# Altium PCB science_board_pcb.PcbDoc
Units mm, origin at the board's own origin, x right, y up, seen from the top; angles counter-clockwise.
Board outline 99.7 x 80 mm, 2 copper layers (Top Layer, GND); 126 components, 64 nets, 371 pads, 90 vias.
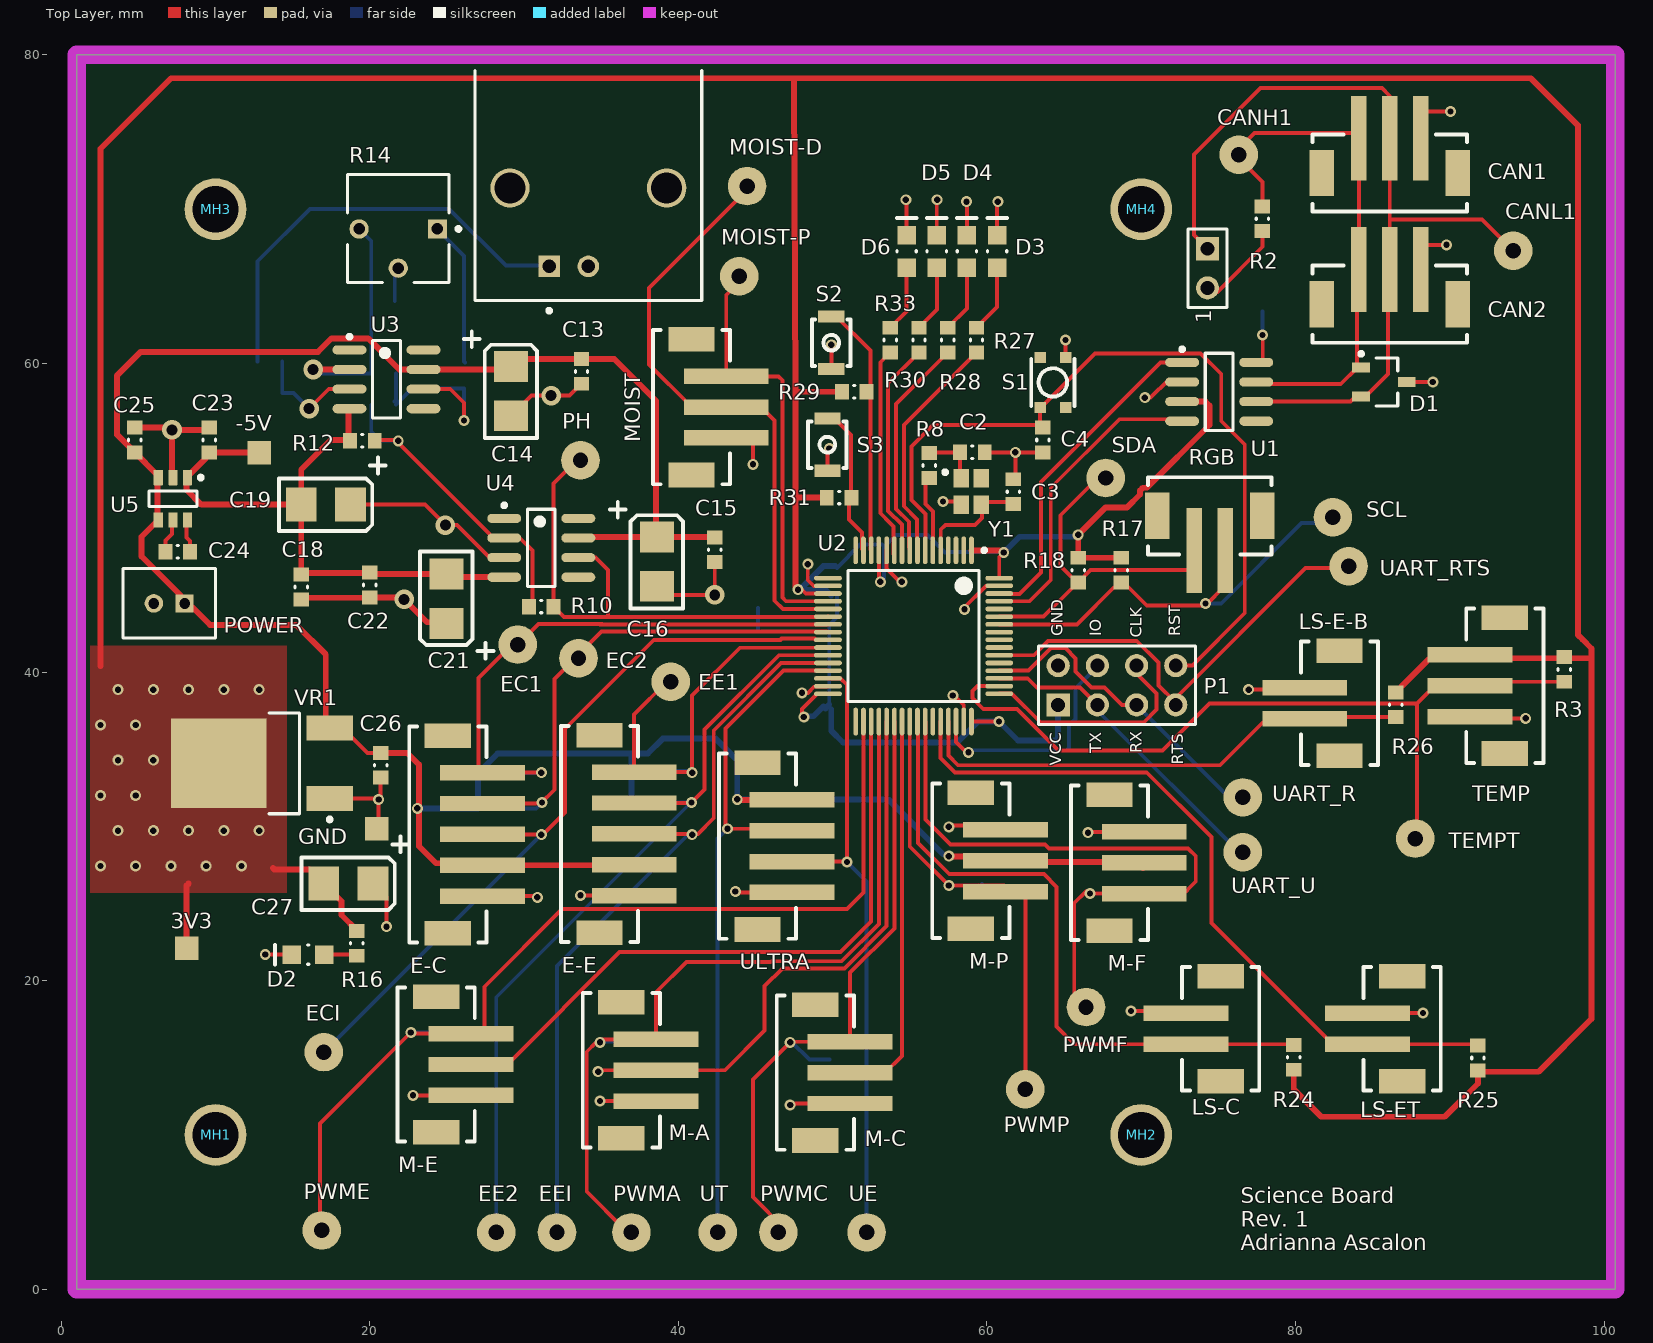
[diagram p0: Top Layer view]
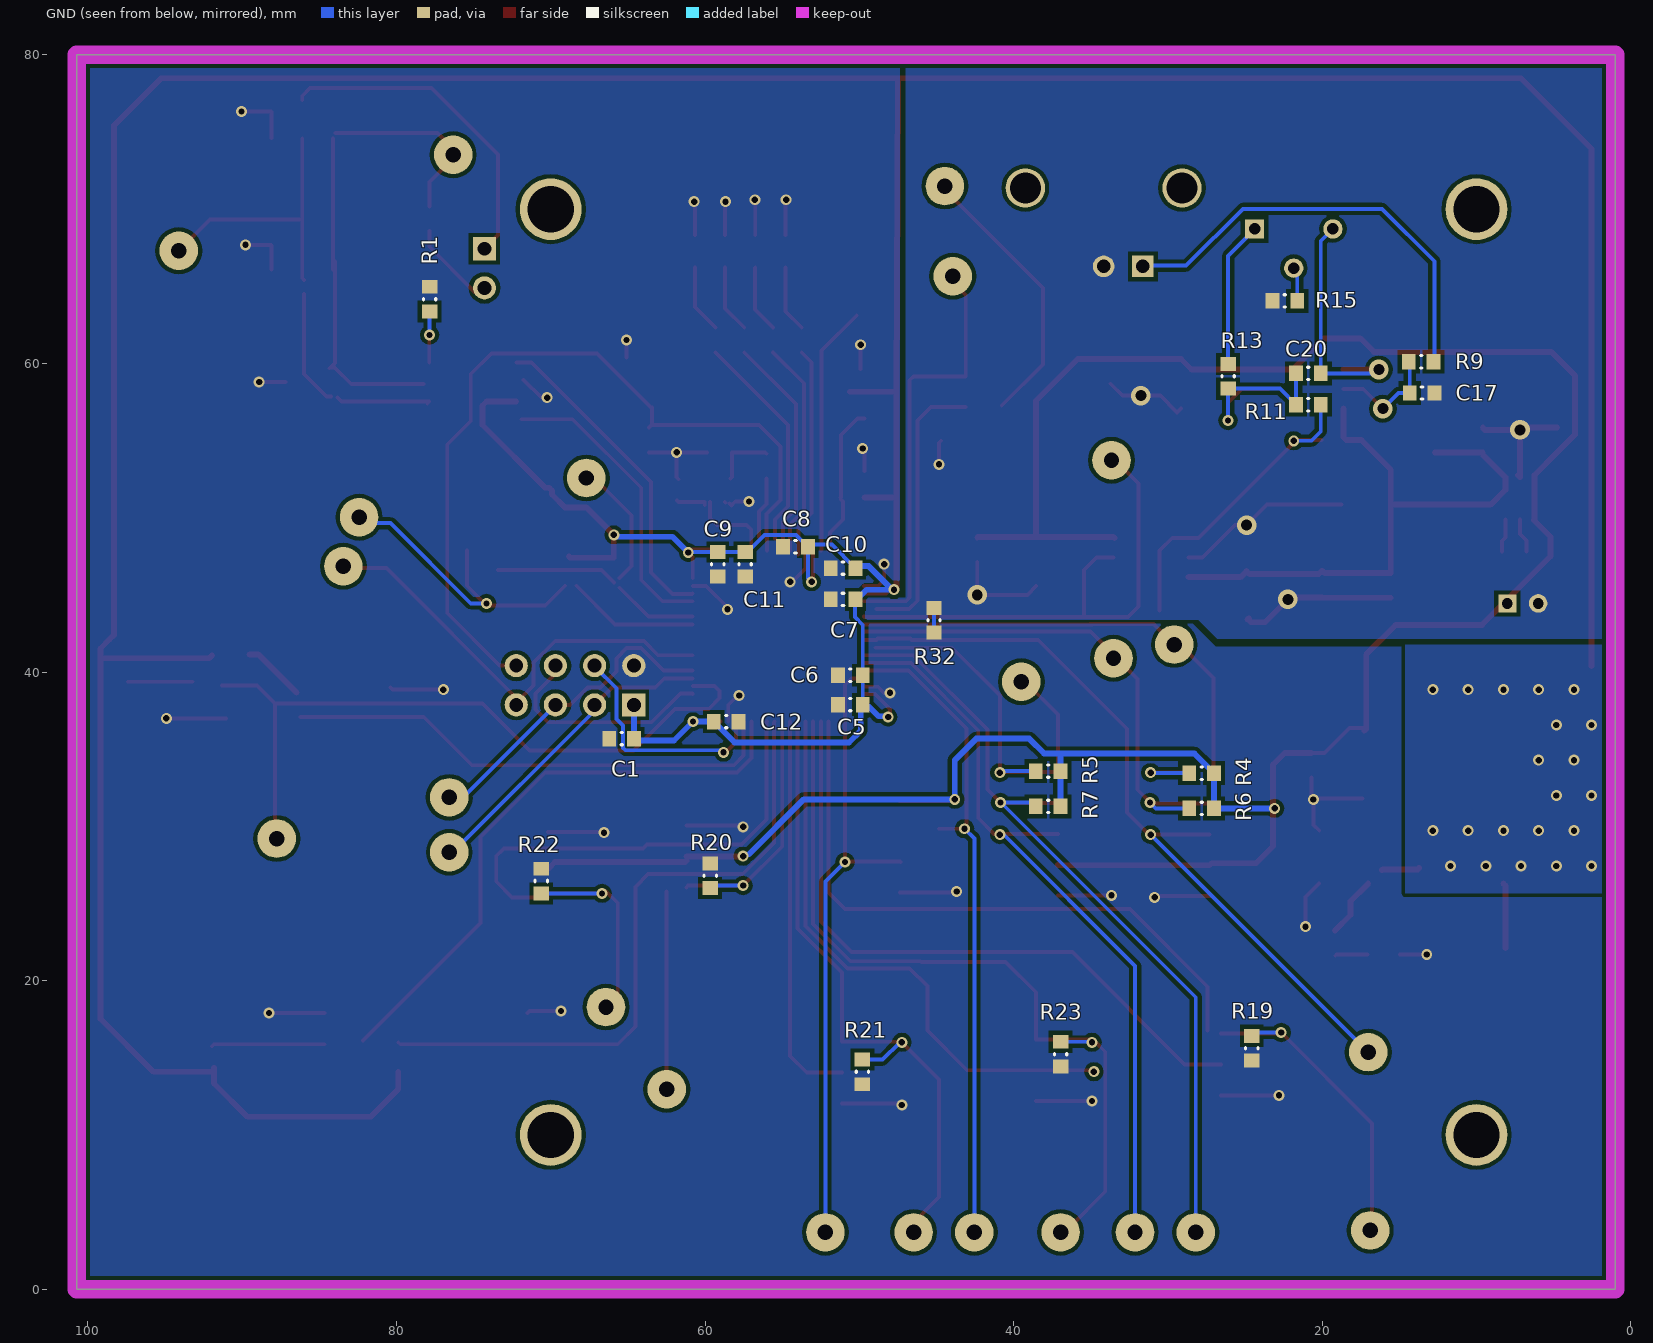
[diagram p1: GND view, seen from below]

## Layer stack, top to bottom
Top Solder: solder mask 0.0102, Solder Resist, Dk 3.5
Top Layer: signal copper 0.0356
Dielectric 1: dielectric 0.32, FR-4, Dk 4.8
GND: signal copper 0.0356
Bottom Solder: solder mask 0.0102, Solder Resist, Dk 3.5

## Board outline
1.016,0 100.711,0 100.711,80 1.016,80

## Design rules (kind name [scope] priority, off if disabled: settings)
BoardOutlineClearance [All] p1: gap=0.254 ignorepadtopadclearanceinfootprint=FALSE except(0: Arc-SplitContinuation Track-SplitContinuation SMDPad-SplitContinuation THPad-SplitContinuation Via-SplitContinuation Fill-SplitContinuation Poly-SplitContinuation Region-SplitContinuation Text-SplitContinuation)
Clearance [All] p1: gap=0.254 ignorepadtopadclearanceinfootprint=TRUE except(0: Arc-Hole Track-Hole SMDPad-Hole THPad-Hole Via-Hole Fill-Hole Poly-Hole Region-Hole Text-Hole; 0.127: Arc-SMDPad Track-SMDPad SMDPad-SMDPad; 0.203: Arc-Arc Arc-Track Track-Track)
HoleSize [All] p1: absolutevalues=TRUE maxlimit=3.81 minlimit=0.025 maxpercent=80.000 minpercent=20.000
PolygonConnect [All] p1: connectstyle=Direct reliefconductorwidth=0.254 reliefentries=4 polygonreliefangle="90 Angle" airgapwidth=0.254
RoutingVias [All] p1: holewidth=0.406 width=0.711 viastyle="Through Hole" minholewidth=0.406 minwidth=0.711 maxholewidth=0.711 maxwidth=1.27
SolderMaskExpansion [All] p1: expansion=0.102
Width thicc [(InNet('-5V') OR InNet('+3V3') OR InNet('+5V'))] p1: maxlimit=0.508 minlimit=0.254 preferedwidth=0.381 minimp=50.000000 maximp=50.000000 favimp=50.000000
Width [All] p2: maxlimit=0.508 minlimit=0.203 preferedwidth=0.254 bottomlayer_minwidth=0.254 bottomlayer_maxwidth=0.254 minimp=50.000000 maximp=50.000000 favimp=50.000000
29 further rules are at their usual default settings.

## Classes and differential pairs
component class support: -5V D3 D4 D5 D6 EC1 EC2 ECI EE1 EE2 EEI MH1 MH2 MH3 MH4 MOIST-D MOIST-P PH PWMA PWMC PWME PWMF PWMP R17 R18 R19 R20 R21 R22 R23 R24 R25 R26 R27 R28 R29 R30 R31 R32 R33 S2 S3 SCL SDA TEMPT UART_R UART_RTS UART_U UE UT
component class power: 3V3 C26 C27 D2 GND R16 VR1
component class ph: C13 C14 C15 C16 C17 C18 C19 C20 C21 C22 C23 C24 C25 R9 R10 R11 R12 R13 R14 R15 U3 U4 U5
component class mcu: C2 C3 C4 C5 C6 C7 C8 C9 C10 C11 C12 R8 S1 U2 Y1
component class connectors: CAN1 CAN2 E-C E-E LS-C LS-E-B LS-ET M-A M-C M-E M-F M-P MOIST P1 POWER R3 R4 R5 R6 R7 RGB TEMP ULTRA
component class can: 1 C1 CANH1 CANL1 D1 R1 R2 U1

## Components (designator, comment, footprint, x,y, rotation, side; value= is the part's Value field where it differs from the comment)
1 "Header 2" HDR1X2 74.295,67.437 r270 top
3V3 "TESTPOINT_SMD" TESTPOINT 8.128,22.098 r90 top
-5V "TESTPOINT_SMD" TESTPOINT 12.827,54.229 r90 top
C1 "CAP_0.1uF_16V_0603" CAPC0603(1608)55_N 65.405,35.687 r180 bottom value=0.1uF
C2 "CAP_15pF_0603" CAPC0603(1608)55_N 59.055,54.24 r180 top locked value=15pF
C3 "CAP_15pF_0603" CAPC0603(1608)55_N 61.715,51.699 r270 top locked value=15pF
C4 "CAP_0.1uF_16V_0603" CAPC0603(1608)55_N 63.627,55.04 r90 top locked value=0.1uF
C5 "CAP_0.1uF_16V_0603" CAPC0603(1608)55_N 50.579,37.895 r0 bottom value=0.1uF
C6 "CAP_0.1uF_16V_0603" CAPC0603(1608)55_N 50.579,39.8 r0 bottom value=0.1uF
C7 "CAP_0.1uF_16V_0603" CAPC0603(1608)55_N 51.054,44.708 r0 bottom value=0.1uF
C8 "CAP_4.7uF_0603" CAPC0603(1608)55_N 54.135,48.116 r180 bottom value=4.7uF
C9 "CAP_0.1uF_16V_0603" CAPC0603(1608)55_N 59.182,46.99 r270 bottom value=0.1uF
C10 "CAP_4.7uF_0603" CAPC0603(1608)55_N 51.054,46.74 r180 bottom value=4.7uF
C11 "CAP_10nF_0603" CAPC0603(1608)55_N 57.404,46.99 r90 bottom value=10nF
C12 "CAP_1uF_16V_0603" CAPC0603(1608)55_N 58.636,36.79 r0 bottom value=1uF
C13 "CAP_0.1uF_50V_0603" CAPC0603(1608)55_N 33.72,59.485 r90 top value=0.1uF
C14 "CAP_10uF_0603_POL" AVX-CAPC3528_V 29.148,58.215 r270 top value=10uF
C15 "CAP_0.1uF_50V_0603" CAPC0603(1608)55_N 42.356,47.928 r90 top value=0.1uF
C16 "CAP_10uF_0603_POL" AVX-CAPC3528_V 38.608,47.166 r270 top value=10uF
C17 "CAP_2.2nF_0603" CAPC0603(1608)55_N 13.527,58.088 r0 bottom value=2.2nF
C18 "CAP_0.1uF_50V_0603" CAPC0603(1608)55_N 15.559,45.515 r90 top value=0.1uF
C19 "CAP_10uF_0603_POL" AVX-CAPC3528_V 17.159,50.849 r180 top value=10uF
C20 "CAP_1uF_16V_0603" CAPC0603(1608)55_N 20.893,59.358 r0 bottom value=1uF
C21 "CAP_10uF_0603_POL" AVX-CAPC3528_V 24.957,44.753 r90 top value=10uF
C22 "CAP_0.1uF_50V_0603" CAPC0603(1608)55_N 20.004,45.642 r90 top value=0.1uF
C23 "CAP_1uF_16V_0603" CAPC0603(1608)55_N 9.59,55.04 r90 top value=1uF
C24 "CAP_1uF_16V_0603" CAPC0603(1608)55_N 7.558,47.801 r0 top value=1uF
C25 "CAP_1uF_16V_0603" CAPC0603(1608)55_N 4.764,55.04 r270 top value=1uF
C26 "CAP_0.33uF_16V_0603" CAPC0603(1608)55_N 20.701,33.958 r90 top value=0.33uF
C27 "10uF" AVX-CAPC3528_V 18.618,26.289 r180 top
CAN1 "PH TOP SMD" JST-B3B-SM4-TB 86.106,69.85 r0 top
CAN2 "PH TOP SMD" JST-B3B-SM4-TB 86.106,61.341 r0 top locked
CANH1 "TESTPOINT_LOOP" TESTPOINT_LOOP 76.327,73.533 r0 top
CANL1 "TESTPOINT_LOOP" TESTPOINT_LOOP 94.107,67.31 r90 top
D1 "TVS_DIODE_CAN" TVS_DIODE_CAN 85.725,58.801 r0 top
D2 "DIO_LED_R" LED_0805_LINE 16.002,21.688 r180 top
D3 "DIO_LED_Y" LED_0805_LINE 60.655,67.267 r90 top
D4 "DIO_LED_G" LED_0805_LINE 58.7,67.267 r90 top
D5 "DIO_LED_G" LED_0805_LINE 56.744,67.267 r90 top
D6 "DIO_LED_G" LED_0805_LINE 54.789,67.267 r90 top
E-C "PH TOP SMD" JST-B5B-SM4-TB 22.555,29.481 r270 top
E-E "PH TOP SMD" JST-B5B-SM4-TB 32.385,29.512 r270 top
EC1 "TESTPOINT_LOOP" TESTPOINT_LOOP 29.591,41.783 r0 top
EC2 "TESTPOINT_LOOP" TESTPOINT_LOOP 33.528,40.894 r0 top
ECI "TESTPOINT_LOOP" TESTPOINT_LOOP 17.018,15.367 r0 top
EE1 "TESTPOINT_LOOP" TESTPOINT_LOOP 39.497,39.37 r90 top
EE2 "TESTPOINT_LOOP" TESTPOINT_LOOP 28.194,3.683 r90 top
EEI "TESTPOINT_LOOP" TESTPOINT_LOOP 32.131,3.683 r90 top
GND "TESTPOINT_SMD" TESTPOINT 20.447,29.845 r90 top
LS-C "PH TOP SMD" JST-B2B-SM4-TB 77.648,16.875 r90 top locked
LS-E-B "PH TOP SMD" JST-B2B-SM4-TB 85.344,37.973 r90 top
LS-ET "PH TOP SMD" JST-B2B-SM4-TB 89.408,16.875 r90 top locked
M-A "PH TOP SMD" JST-B3B-SM4-TB 33.803,14.194 r270 top
M-C "PH TOP SMD" JST-B3B-SM4-TB 46.376,14.038 r270 top
M-E "PH TOP SMD" JST-B3B-SM4-TB 21.801,14.565 r270 top
M-F "PH TOP SMD" JST-B3B-SM4-TB 65.445,27.641 r270 top locked
M-P "PH TOP SMD" JST-B3B-SM4-TB 56.456,27.768 r270 top
MH1 "MOUNTING_HOLES" MOUNTING_HOLE#1 5.715,8 r0 top
MH2 "MOUNTING_HOLES" MOUNTING_HOLE#2 122,5 r0 top
MH3 "MOUNTING_HOLES" MOUNTING_HOLE#3 106,11 r0 top
MH4 "MOUNTING_HOLES" MOUNTING_HOLE#4 111.374,5.612 r0 top
MOIST "PH TOP SMD" JST-B3B-SM4-TB 38.354,57.176 r270 top
MOIST-D "TESTPOINT_LOOP" TESTPOINT_LOOP 44.45,71.501 r90 top
MOIST-P "TESTPOINT_LOOP" TESTPOINT_LOOP 43.942,65.659 r90 top
P1 "HEADER 4X2" HEADER_2X4 64.616,37.876 r0 top locked
PH "TESTPOINT_LOOP" TESTPOINT_LOOP 33.655,53.721 r90 top
POWER "PH TOP TH" JST-B2B-PHSK 7.001,44.45 r180 top
PWMA "TESTPOINT_LOOP" TESTPOINT_LOOP 36.957,3.683 r90 top
PWMC "TESTPOINT_LOOP" TESTPOINT_LOOP 46.482,3.683 r90 top
PWME "TESTPOINT_LOOP" TESTPOINT_LOOP 16.891,3.81 r90 top
PWMF "TESTPOINT_LOOP" TESTPOINT_LOOP 66.421,18.288 r90 top
PWMP "TESTPOINT_LOOP" TESTPOINT_LOOP 62.484,12.954 r90 top
R1 "RES_0R_0603" RESC0603(1608)_N 77.851,64.173 r90 bottom value=0R
R2 "RES_120R_0603" RESC0603(1608)_N 77.851,69.38 r270 top value=120R
R3 "RES_4K7_0603" RESC0603(1608)_N 97.409,40.17 r90 top value=4K7
R4 "RES_10K_0603" RESC0603(1608)_N 27.813,33.45 r180 bottom value=10K
R5 "RES_10K_0603" RESC0603(1608)_N 37.766,33.585 r180 bottom value=10K
R6 "RES_10K_0603" RESC0603(1608)_N 27.813,31.165 r180 bottom value=10K
R7 "RES_10K_0603" RESC0603(1608)_N 37.766,31.291 r180 bottom value=10K
R8 "RES_0R_0603" RESC0603(1608)_N 56.261,53.389 r90 top value=0R
R9 "RES_4M7_0603" RESC0603(1608)_N 13.589,60.12 r0 bottom value=4.7M
R10 "RES_30K_0603" RESC0603(1608)_N 31.115,44.245 r0 top value=30K
R11 "RES_30K_0603" RESC0603(1608)_N 20.893,57.326 r180 bottom value=30K
R12 "RES_75K_0603" RESC0603(1608)_N 19.52,54.991 r0 top value=75K
R13 "RES_2K2_0603" RESC0603(1608)_N 26.1,59.17 r270 bottom value=2K2
R14 "POT_5K" 3362P-1-502LF 21.844,68.756 r180 top value=5K
R15 "RES_1K_0603" RESC0603(1608)_N 22.417,64.057 r180 bottom value=1K
R16 "RES_100R_0603" RESC0603(1608)_N 19.153,22.413 r90 top value=100R
R17 "RES_4K7_0603" RESC0603(1608)_N 68.707,46.609 r90 top value=4K7
R18 "RES_4K7_0603" RESC0603(1608)_N 65.913,46.609 r90 top value=4K7
R19 "RES_10K_0603" RESC0603(1608)_N 24.56,15.621 r90 bottom value=10K
R20 "RES_10K_0603" RESC0603(1608)_N 59.67,26.797 r270 bottom value=10K
R21 "RES_10K_0603" RESC0603(1608)_N 49.797,14.088 r90 bottom value=10K
R22 "RES_10K_0603" RESC0603(1608)_N 70.612,26.454 r270 bottom value=10K
R23 "RES_10K_0603" RESC0603(1608)_N 36.957,15.24 r90 bottom value=10K
R24 "RES_10K_0603" RESC0603(1608)_N 79.883,15.024 r270 top value=10K
R25 "RES_10K_0603" RESC0603(1608)_N 91.821,14.986 r270 top value=10K
R26 "RES_10K_0603" RESC0603(1608)_N 86.487,37.884 r90 top value=10K
R27 "RES_100R_0603" RESC0603(1608)_N 59.321,61.52 r90 top value=100R
R28 "RES_100R_0603" RESC0603(1608)_N 57.458,61.52 r90 top value=100R
R29 "RES_10K_0603" RESC0603(1608)_N 51.397,58.166 r180 top value=10K
R30 "RES_100R_0603" RESC0603(1608)_N 55.596,61.52 r90 top value=100R
R31 "RES_10K_0603" RESC0603(1608)_N 50.419,51.308 r0 top value=10K
R32 "RES_0R_0603" RESC0603(1608)_N 45.162,43.356 r90 bottom value=0R
R33 "RES_100R_0603" RESC0603(1608)_N 53.733,61.52 r90 top value=100R
RGB "PH TOP SMD" JST-B2B-SM4-TB 74.438,52.629 r180 top
S1 "SW_PWR" PTS830GM140 64.271,58.77 r270 top
S2 "SW_TACTILE" B3U-1100P 49.911,61.341 r270 top
S3 "SW_TACTILE" B3U-1100P 49.657,54.737 r270 top
SCL "TESTPOINT_LOOP" TESTPOINT_LOOP 82.423,50.038 r0 top
SDA "TESTPOINT_LOOP" TESTPOINT_LOOP 67.691,52.578 r0 top
TEMP "PH TOP SMD" JST-B3B-SM4-TB 96.063,39.116 r90 top
TEMPT "TESTPOINT_LOOP" TESTPOINT_LOOP 87.757,29.21 r90 top
U1 "IC TXRX CAN" LT-S8_N 75.05,58.166 r0 top
U2 "STM32F091RC" STM_LQFP64_N 55.245,42.34 r270 top locked
U3 "CA3140AMZ" CA3140AMZ 21.082,58.977 r0 top
U4 "TL081BCDG4" TL081BCDG4 31.115,48.055 r0 top
U5 "LM2776" SOT23-6 7.239,51.23 r270 top
UART_R "TESTPOINT_LOOP" TESTPOINT_LOOP 76.581,31.877 r90 top
UART_RTS "TESTPOINT_LOOP" TESTPOINT_LOOP 83.439,46.863 r90 top
UART_U "TESTPOINT_LOOP" TESTPOINT_LOOP 76.581,28.321 r90 top
UE "TESTPOINT_LOOP" TESTPOINT_LOOP 52.197,3.683 r90 top
ULTRA "PH TOP SMD" JST-B4B-SM4-TB 42.621,28.718 r270 top locked
UT "TESTPOINT_LOOP" TESTPOINT_LOOP 42.545,3.683 r90 top
VR1 "5V0_3V3_LDO" VOLTAGE_REGULATOR 14.605,34.085 r90 top
Y1 "CRYSTAL_32MHZ" AVX-CX2520DB32000D0GEJZ1-4_V 58.992,51.699 r0 top locked

## Footprints (in the part's own frame and the unit in brackets; to place one, negate y for a bottom-side part, rotate by r counter-clockwise, add the part's x,y. Pads: shape width x height; smd on the part's side, far side on the other; paste and mask are expansions set on the pad)
3362P-1-502LF [mm]
  rect 1.25x1.25 hole 0.75: 1(-2.54,0.035)
  round 1.25 hole 0.75: 2(0,2.575) 3(2.54,0.035)
  silkscreen extent -4.03,-3.49 3.3,3.49, body extent -3.3,-3.49 3.3,3.49, height 4.95
AVX-CAPC3528_V [mm] "SMT Capacitor, 2 Leads, Body 3.5x2.8mm"
  rect 2x2.2 smd: 1(-1.6,0) 2(1.6,0)
  silkscreen extent -3.87,-3.05 3.05,1.7, body extent -1.79,-1.54 1.8,1.54, height 1.9
AVX-CX2520DB32000D0GEJZ1-4_V [mm] "Hand Drawn, 4-Leads,Body 2.5x2mm"
  rect 1x1.2 smd: 1(-0.65,0.85) 2(-0.65,-0.85) 3(0.65,-0.85) 4(0.65,0.85)
  silkscreen extent -1.82,1.13 -1.58,1.38, body extent -1,-1.25 1,1.25, height 0.55
B3U-1100P [mm] "TACTILE SWITCH GREY"
  rect 0.8x1.7 smd: 1(-1.7,0) 2(1.7,0)
  silkscreen extent -1.5,-1.25 1.5,1.25
CA3140AMZ [mm]
  oval 2.2x0.6 smd: 1(-2.4,1.905) 2(-2.4,0.635) 3(-2.4,-0.635) 4(-2.4,-1.905) 5(2.4,-1.905) 6(2.4,-0.635) 7(2.4,0.635) 8(2.4,1.905)
  silkscreen extent -2.52,-2.5 0.9,2.88, body extent -2,-2.5 2,2.5, height 1.75
CAPC0603(1608)55_N [mm] "Chip Capacitor, Body 1.6x0.8mm, Height 0.55mm, IPC Medium Density"
  rect 0.9x1 smd: 1(-0.8,0) 2(0.8,0)
  silkscreen extent -0.05,-0.4 0.05,0.4, body extent -0.87,-0.48 0.88,0.47, height 0.55
HDR1X2 [mm] "Connector; Header; 2 Position"
  rect 1.5x1.5 hole 0.9: 1(0,0)
  round 1.5 hole 0.9: 2(2.54,0)
  silkscreen extent -1.27,-1.27 3.81,1.27
HEADER_2X4 [mm]
  rect 1.5x1.5 hole 0.9: 1(0,0)
  round 1.5 hole 0.9: 2(2.54,0) 3(5.08,0) 4(7.62,0) 5(0,2.54) 6(2.54,2.54) 7(5.08,2.54) 8(7.62,2.54)
  silkscreen extent -1.27,-1.27 8.89,3.81
JST-B2B-PHSK [mm]
  rect 1.162x1.162 / inner rect 1.524x1.524 / far side rect 1.162x1.162 hole 0.7: 1(-1,0)
  round 1.2 / inner round 1.524 / far side round 1.2 hole 0.7: 2(1,0)
  silkscreen extent -3,-2.25 3,2.25
JST-B2B-SM4-TB [mm]
  rect 1x5.5 smd: 1(-1,4.75) 2(1,4.75)
  rect 1.6x3 smd: 3(-3.4,2.5) 4(3.4,2.5)
  silkscreen extent -4,0 4,5
JST-B3B-SM4-TB [mm]
  rect 1x5.5 smd: 1(-2,4.75) 2(0,4.75) 3(2,4.75)
  rect 1.6x3 smd: 4(-4.4,2.5) 5(4.4,2.5)
  silkscreen extent -5,0 5,5
JST-B4B-SM4-TB [mm]
  rect 1x5.5 smd: 1(-3,4.75) 2(-1,4.75) 3(1,4.75) 4(3,4.75)
  rect 1.6x3 smd: 5(-5.4,2.5) 6(5.4,2.5)
  silkscreen extent -6,0 6,5
JST-B5B-SM4-TB [mm]
  rect 1x5.5 smd: 1(-4,4.75) 2(-2,4.75) 3(0,4.75) 4(2,4.75) 5(4,4.75)
  rect 1.6x3 smd: 6(-6.4,2.5) 7(6.4,2.5)
  silkscreen extent -7,0 7,5
LED_0805_LINE [mm] "SMD, 2-Leads, Body 2x1.25mm"
  rect 1.2x1.2 smd: 1(-1.05,0) 2(1.05,0)
  silkscreen extent -0.05,-0.63 2.16,0.64, body extent -1,-0.63 1,0.63, height 0.8
LT-S8_N [mm] "SOP, 8-Leads, Body 4.9x3.9mm, Pitch 1.27mm, IPC Medium Density"
  oval 2.2x0.6 smd: 1(-2.4,1.905) 2(-2.4,0.635) 3(-2.4,-0.635) 4(-2.4,-1.905) 5(2.4,-1.905) 6(2.4,-0.635) 7(2.4,0.635) 8(2.4,1.905)
  silkscreen extent -2.52,-2.5 0.9,2.88, body extent -2,-2.5 2,2.5, height 1.76
MOUNTING_HOLE#1 [mm]
  round 4 hole 3 unplated: 0(4.285,2)
MOUNTING_HOLE#2 [mm]
  round 4 hole 3 unplated: 0(-52,5)
MOUNTING_HOLE#3 [mm]
  round 4 hole 3 unplated: 0(-96,59)
MOUNTING_HOLE#4 [mm]
  round 4 hole 3 unplated: 0(-41.374,64.388)
PTS830GM140 [mm] "PWR TACTILE SWITCH (RED)"
  rect 0.7x0.75 smd: 1(-1.625,0.825) 2(1.625,0.825) 3(-1.625,-0.825) 4(1.625,-0.825)
  silkscreen extent -1.53,-1.4 1.52,1.4
RESC0603(1608)_N [mm] "Chip Resistor, Body 1.6x0.8mm, IPC Medium Density"
  rect 0.9x1 smd: 1(-0.8,0) 2(0.8,0)
  silkscreen extent -0.05,-0.4 0.05,0.4, body extent -0.85,-0.47 0.85,0.47, height 0.6
SOT23-6 [mm] "SOT23, 6-Leads, Body 3.05x1.75mm, Pitch 0.95mm, IPC Medium Density"
  rrect17% 1x0.6 smd: 1(-1.375,0.95) 2(-1.375,0) 3(-1.375,-0.95) 4(1.375,-0.95) 5(1.375,0) 6(1.375,0.95)
  silkscreen extent -1.5,-1.55 0.5,1.93, body extent -1.43,-1.48 1.43,1.49, height 0.9
STM_LQFP64_N [mm] "Thin QFP, 64-Leads, Body 10x10mm, Pitch 0.5mm, IPC Medium Density"
  oval 1.8x0.3 smd mask+0.05: 1(-5.55,3.75) 2(-5.55,3.25) 3(-5.55,2.75) 4(-5.55,2.25) 5(-5.55,1.75) 6(-5.55,1.25) 7(-5.55,0.75) 8(-5.55,0.25) 9(-5.55,-0.25) 10(-5.55,-0.75) 11(-5.55,-1.25) 12(-5.55,-1.75) 13(-5.55,-2.25) 14(-5.55,-2.75) 15(-5.55,-3.25) 16(-5.55,-3.75) 33(5.55,-3.75) 34(5.55,-3.25) 35(5.55,-2.75) 36(5.55,-2.25) 37(5.55,-1.75) 38(5.55,-1.25) 39(5.55,-0.75) 40(5.55,-0.25) 41(5.55,0.25) 42(5.55,0.75) 43(5.55,1.25) 44(5.55,1.75) 45(5.55,2.25) 46(5.55,2.75) 47(5.55,3.25) 48(5.55,3.75)
  oval 0.3x1.8 smd mask+0.05: 17(-3.75,-5.55) 18(-3.25,-5.55) 19(-2.75,-5.55) 20(-2.25,-5.55) 21(-1.75,-5.55) 22(-1.25,-5.55) 23(-0.75,-5.55) 24(-0.25,-5.55) 25(0.25,-5.55) 26(0.75,-5.55) 27(1.25,-5.55) 28(1.75,-5.55) 29(2.25,-5.55) 30(2.75,-5.55) 31(3.25,-5.55) 32(3.75,-5.55) 49(3.75,5.55) 50(3.25,5.55) 51(2.75,5.55) 52(2.25,5.55) 53(1.75,5.55) 54(1.25,5.55) 55(0.75,5.55) 56(0.25,5.55) 57(-0.25,5.55) 58(-0.75,5.55) 59(-1.25,5.55) 60(-1.75,5.55) 61(-2.25,5.55) 62(-2.75,5.55) 63(-3.25,5.55) 64(-3.75,5.55)
  silkscreen extent -5.67,-4.25 4.25,4.7, body extent -5,-5 5,5, height 1.6
TESTPOINT [mil]
  rect 60x60 smd: 1(0,0)
TESTPOINT_LOOP [mm]
  round 2.5 hole 1: 1(0,0)
TL081BCDG4 [mm]
  oval 2.2x0.6 smd: 1(-2.4,1.905) 2(-2.4,0.635) 3(-2.4,-0.635) 4(-2.4,-1.905) 5(2.4,-1.905) 6(2.4,-0.635) 7(2.4,0.635) 8(2.4,1.905)
  silkscreen extent -2.52,-2.5 0.9,2.88, body extent -2,-2.5 2,2.5, height 1.75
TVS_DIODE_CAN [mm] "SOT23, 3-Leads, Body 2.95x2.80mm, Pitch 0.95mm, IPC Low Density"
  rect 1.15x0.65 smd: 1(-1.475,0.95) 2(-1.475,-0.95) 3(1.475,0)
  silkscreen extent -1.6,-1.55 0.9,1.95, body extent -1.5,-1.55 1.5,1.55, height 1.25
VOLTAGE_REGULATOR [mm] "DPAK, 3-Leads, Body 6.095x6.54mm, Pitch 4.57mm"
  rect 1.6x3 smd: 1(-2.285,-2.79) 3(2.285,-2.79)
  rect 5.8x6.2 smd: 2(0,4.39)
  silkscreen extent -3.76,-2.92 3.27,1.14, body extent -3.27,-0.84 3.27,5.25, height 2.38

## Part data
1: "Header, 2-Pin", LatestRevisionDate=17-Jul-2002, LatestRevisionNote="Re-released for DXP Platform.", Publisher="Altium Limited"
C1 C4 C5 C6 C7 C9: "CAP CER 0.1UF 16V X7R 0603", Digikey Part Number=311-1088-1-ND, Manufacturer=Yageo, MPN=CC0603KRX7R7BB104, Package="0603 (1608 Metric)", Temperature Coefficient=X7R, Voltage Rating=16V, Dimensions="0.063\" L x 0.031\" W (1.60mm x 0.80mm)"
C2 C3: "CAP CER 15PF 250V NPO 0603", Digikey Part Number=311-3282-1-ND, Manufacturer=Yageo, MPN=AC0603JRNPOYBN150, Package="0603 (1608 Metric)", Temperature Coefficient=NP0, Voltage Rating=250v, Dimensions="0.063\" L x 0.031\" W (1.60mm x 0.80mm)"
C8 C10: "CAP CER 4.7UF 6.3V X5R 0603", Digikey Part Number=311-1521-1-ND, Manufacturer=Yageo, MPN=CC0603KRX5R5BB475, Package="0603 (1608 Metric)", Temperature Coefficient=X5R, Voltage Rating=6.3V, Dimensions="0.063\" L x 0.031\" W (1.60mm x 0.80mm)"
C11: "CAP CER 10000PF 16V X7R 0603", Digikey Part Number=311-3369-1-ND, Manufacturer=Yageo, MPN=CC0603KRX7R7BB103, Package="0603 (1608 Metric)", Temperature Coefficient=X7R, Voltage Rating=16V, Dimensions="0.063\" L x 0.031\" W (1.60mm x 0.80mm)"
C12 C20 C23 C24 C25: "CAP CER 1UF 16V Y5V 0603", Digikey Part Number=311-1372-1-ND, Manufacturer=Yageo, MPN=CC0603ZRY5V7BB105, Package="0603 (1608 Metric)", Temperature Coefficient=Y5V, Voltage Rating=16V, Dimensions="0.063\" L x 0.031\" W (1.60mm x 0.80mm)"
C13 C15 C18 C22: "CAP CER 0.1UF 50V X7R 0603", Digikey Part Number=311-1344-1-ND, Manufacturer=Yageo, MPN=CC0603KRX7R9BB104, Package="0603 (1608 Metric)", Temperature Coefficient=X7R, Voltage Rating=50V, Dimensions="0.063\" L x 0.031\" W (1.60mm x 0.80mm)"
C14 C16 C19 C21: "Capacitor, Tantalum, 10uF 10% 20V MCCT-B (3528)", Manufacturer=Yageo, Package="0603 (1608 Metric)", Part Number=CC0603MRX5R6BB106, Temperature Coefficient=X5R, Voltage Rating=10V, Dimensions="0.063\" L x 0.031\" W (1.60mm x 0.80mm)"
C17: "CAP CER 2.2NF 25V X7R 0603", Digikey Part Number=311-3653-1-ND, Manufacturer=Yageo, MPN=CC0603KRX7R8BB222, Package="0603 (1608 Metric)", Temperature Coefficient=X7R, Voltage Rating=25V, Dimensions="0.063\" L x 0.031\" W (1.60mm x 0.80mm)"
C26: "CAP CER 0.33UF 16V X7R 0603", Digikey Part Number=490-6050-1-ND, Manufacturer="Murata Electronics North America", MPN=GCM188R71C334KA37D, Package="0603 (1608 Metric)", Temperature Coefficient=X7R, Voltage Rating=16V, Dimensions="0.063\" L x 0.031\" W (1.60mm x 0.80mm)"
C27: library part CAP_10uF_0603, "CAP CER 10UF 10V X5R 0603", Digikey Part Number=311-1817-1-ND, Manufacturer=Yageo, MPN=CC0603MRX5R6BB106, Package="0603 (1608 Metric)", Voltage Rating=10V, Dimensions="0.063\" L x 0.031\" W (1.60mm x 0.80mm)"
CAN1 CAN2 M-A M-C M-E M-F M-P MOIST TEMP: library part CON_3M_PH_TOP_SMT, "CONN HEADER PH TOP 3POS 2MM SMD", Manufacturer=JST, Part Number=B3B-PH-SM4-TB, ComponentLink1Description=Datasheet, ComponentLink1URL=http://www.jst-mfg.com/product/pdf/eng/ePH.pdf
D1: "TVS DIODE 24V 41V SOT323-3", Digikey Part Number=1727-3891-1-ND, Manufacturer="Nexperia USA Inc.", MPN=PESD2CAN,215, Package="SC-70, SOT-323", ComponentLink1Description=Datasheet, ComponentLink1URL=https://assets.nexperia.com/documents/data-sheet/PESD1CAN-U.pdf
D2: "LED RED DIFFUSED 0805 SMD", Digikey Part Number=475-1278-1-ND, Forward Voltage Drop=2V, Manufacturer=OSRAM, MPN="LS R976-NR-1", Package="0805 (2012 Metric)"
D3: "LED YELLOW DIFFUSED 0805 SMD", Digikey Part Number=475-2560-1-ND, Forward Voltage Drop=2.2V, Manufacturer=OSRAM, MPN="LY R976-PS-36", Package="0805 (2012 Metric)"
D4 D5 D6: "LED GREEN DIFFUSED 0805 SMD", Digikey Part Number=475-1410-1-ND, Forward Voltage Drop=2.2V, Manufacturer=OSRAM, MPN="LG R971-KN-1", Package="0805 (2012 Metric)"
E-C E-E: library part CON_5M_PH_TOP_SMT, "CONN HEADER PH TOP 5POS 2MM SMD", Manufacturer=JST, Part Number=B5B-PH-SM4-TB, ComponentLink1Description=Datasheet, ComponentLink1URL=http://www.jst-mfg.com/product/pdf/eng/ePH.pdf
LS-C LS-E-B LS-ET RGB: library part CON_2M_PH_TOP_SMT, "CONN HEADER PH TOP 2POS 2MM SMD", Manufacturer=JST, Part Number=B2B-PH-SM4-TB, ComponentLink1Description=Datasheet, ComponentLink1URL=http://www.jst-mfg.com/product/pdf/eng/ePH.pdf
MH1 MH2 MH3 MH4: "6cm x 6cm"
P1: "Header, 4-Pin Dual row", Digikey Part Number=S9015E-04-ND, Manufacturer="Sullins Connector Solutions", MPN=GRPB042VWVN-RC
POWER: library part CON_2M_PH_TOP_TH, "CONN HEADER PH TOP 2POS 2MM", Manufacturer=JST, Part Number=B2B-PH-K-S, ComponentLink1Description=Datasheet, ComponentLink1URL=http://www.jst-mfg.com/product/pdf/eng/ePH.pdf
R1 R8 R32: "RES SMD 0 OHM JUMPER 1/10W 0603", Digikey Part Number=311-0.0GRCT-ND, Manufacturer=Yageo, MPN=RC0603JR-070RL, Package="0603 (1608 Metric)", Dimensions="0.063\" L x 0.031\" W (1.60mm x 0.80mm)"
R2: "RES SMD 120 OHM 5% 1/10W 0603", Digikey Part Number=311-120GRCT-ND, Manufacturer=Yageo, MPN=RC0603JR-07120RL, Package="0603 (1608 Metric)", Tolerance=5%, Dimensions="0.063\" L x 0.031\" W (1.60mm x 0.80mm)"
R3 R17 R18: "RES SMD 4.7K OHM 5% 1/10W 0603", Digikey Part Number=311-4.7KGRCT-ND, Manufacturer=Yageo, MPN=RC0603JR-074K7L, Package="0603 (1608 Metric)", Tolerance=5%, Dimensions="0.063\" L x 0.031\" W (1.60mm x 0.80mm)"
R4 R5 R6 R7 R19 R20 R21 R22 R23 R24 R25 R26 R29 R31: "RES SMD 10K OHM 5% 1/10W 0603", Digikey Part Number=311-10KGRCT-ND, Manufacturer=Yageo, MPN=RC0603JR-0710KL, Package="0603 (1608 Metric)", Tolerance=5%, Dimensions="0.063\" L x 0.031\" W (1.60mm x 0.80mm)"
R9: "RES SMD 4.7M OHM 1% 1/10W 0603", Digikey Part Number=311-4.70MHRCT-ND, Manufacturer=Yageo, MPN=RC0603FR-074M7L, Package="0603 (1608 Metric)", Tolerance=1%, Dimensions="0.063\" L x 0.031\" W (1.60mm x 0.80mm)"
R10 R11: "RES SMD 30K OHM 0.5% 1/10W 0603", Digikey Part Number=311-30KDCT-ND, Manufacturer=Yageo, MPN=RT0603DRD0730KL, Package="0603 (1608 Metric)", Tolerance=0.5%, Dimensions="0.063\" L x 0.031\" W (1.60mm x 0.80mm)"
R12: "RES SMD 75K OHM 0.5% 1/10W 0603", Digikey Part Number=311-75KDCT-ND, Manufacturer=Yageo, MPN=RT0603DRD0775KL, Package="0603 (1608 Metric)", Tolerance=0.5%, Dimensions="0.063\" L x 0.031\" W (1.60mm x 0.80mm)"
R13: "RES SMD 2.2K OHM 1% 1/10W 0603", Digikey Part Number=311-2.20KHRCT-ND, Manufacturer=Yageo, MPN=RC0603FR-072K2L, Package="0603 (1608 Metric)", Tolerance=1%, Dimensions="0.063\" L x 0.031\" W (1.60mm x 0.80mm)"
R14: "TRIMMER 5K OHM 0.5W PC PIN TOP", Digikey Part Number=3362P-502LF-ND, Manufacturer="Bourns Inc.", MPN=3362P-1-502LF, Tolerance=10%, Dimensions="0.275\" x 0.260\" Face x 0.185\" H (6.99mm x 6.60mm x 4.70mm)"
R15: "RES SMD 1K OHM 5% 1/10W 0603", Digikey Part Number=311-1.0KGRCT-ND, Manufacturer=Yageo, MPN=RC0603JR-071KL, Package="0603 (1608 Metric)", Tolerance=5%, Dimensions="0.063\" L x 0.031\" W (1.60mm x 0.80mm)"
R16 R27 R28 R30 R33: "RES SMD 100 OHM 1% 1/10W 0603", Digikey Part Number=311-100HRCT-ND, Manufacturer=Yageo, MPN=RC0603FR-07100RL, Package="0603 (1608 Metric)", Tolerance=1%, Dimensions="0.063\" L x 0.031\" W (1.60mm x 0.80mm)"
S1: "Power Switch (Red)", Digikey Part Number=CKN10587CT-ND, Manufacturer=C&K, MPN="PTS830GM140 SMTR LFS", ComponentLink1Description=Datasheet, ComponentLink1URL=https://www.ckswitches.com/media/1478/pts830.pdf
S2 S3: "Tactile Switch (Grey)", Digikey Part Number=SW1021TR-ND, Manufacturer="Omron Electronics Inc-EMC Div", MPN=B3U-1100P
U1: library part LTC2875, "IC TXRX CAN 4MBPS 8SO", Digikey Part Number=LTC2875IS8#PBF-ND, Manufacturer="Linear Technologies", MPN=LTC2875IS8#PBF, Package="8-SOIC (0.154\", 3.90mm Width)", ComponentLink1Description=Datasheet, ComponentLink1URL=https://www.analog.com/media/en/technical-documentation/data-sheets/2875f.pdf
U2: Digikey Part Number=497-15167-ND, Manufacturer=STMicroelectronics, Package=64-LQFP, ComponentLink1Description=Datasheet, ComponentLink1URL=https://www.st.com/content/ccc/resource/technical/document/datasheet/95/3c/2e/5b/21/09/45/a6/DM00115237.pdf/files/DM00115237.pdf/jcr:content/translations/en.DM00115237.pdf#%5B%7B%22num%22%3A96%2C%22gen%22%3A0%7D%2C%7B%22name%22%3A%22XYZ%22%7D%2C67%2C755%2Cnull%5D, MPN=STM32F091RC
U3: "4.5MHz, BiMOS Operational Amplifier with MOSFET Input/Bipolar Output", Digikey Part Number=CA3140AMZ-ND, Manufacturer="Renesas Electronics America Inc.", MPN=CA3140AMZ
U4: "IC OPAMP JFET 3MHZ 8SOIC", Digikey Part Number=296-34259-5-ND, Manufacturer="Texas Instruments", MPN=TL081BCD
U5: "LM2776 Switched Capacitor Inverter", Digikey Part Number=296-43957-1-ND, Manufacturer="Texas Instruments", MPN=LM2776DBVR
ULTRA: library part CON_4M_PH_TOP_SMT, "CONN HEADER PH TOP 4POS 2MM SMD", Manufacturer=JST, Part Number=B4B-PH-SM4-TB, ComponentLink1Description=Datasheet, ComponentLink1URL=http://www.jst-mfg.com/product/pdf/eng/ePH.pdf
VR1: "IC REG LINEAR 3.3V 1A DPAK", Current Output=1A, Digikey Part Number=NCP1117DT33T5GOSCT-ND, Manufacturer="ON Semiconductor", MPN=NCP1117DT33T5G
Y1: "CRYSTAL 32MHZ 8PF SMD", Digikey Part Number=1253-1730-1-ND, Manufacturer="Kyocera International Inc. Electronic Components", MPN=CX2520DB32000D0GPSC1, Package="4-SMD, No Lead", Dimensions="0.098\" L x 0.079\" W (2.50mm x 2.00mm)"

## Free pads (board coordinates)
  rect 1.4x1.4 hole 0.89: 1(31.623,66.294)
  round 1.4 hole 0.89: 2(34.163,66.294)
  round 2.55 hole 2.01: MH1(29.083,71.374) MH2(39.243,71.374)

## Via types
v1: diameter 0.711, hole 0.406, Top Layer to GND, 62 vias
v2: diameter 0.711, hole 0.406, Top Layer to GND, tented both sides, 21 vias
v3: diameter 1.27, hole 0.711, Top Layer to GND, 7 vias

## Nets (pads, with @x,y where several pads share a name; then routed paths per layer and width w, separated by ;. In a path a pad name is that pad's centre, name@x,y a point inside that pad or via, vN(x,y) a via of type N, cw(c..) or ccw(c..) an arc to the next point about the centre after c; other vN are vias at no path point)
+3V3: 3V3.1 C1.2 C5.1 C6.1 C7.1 C8.2 C9.1 C10.2 C11.2 C12.2 C27.2 P1.1 R3.2 R16.2 R17.2 R18.2 R24.2 R25.2 R26.2 R29.2 R31.1 TEMP.3 U1.3 U2.1 U2.13 U2.19 U2.32 U2.48 U2.64 VR1.2 | length 361.2
  Top Layer w0.254: v1(47.752,45.339) 47.879,45.466 48.255,45.09 U2.19 ; v1@48.006,37.133 48.006,37.61 48.986,38.59 U2.32 ; U2.13 52.995,45.938 v1(53.086,45.847) ; U2.48 v1(60.786,36.79) ; U2.64 60.795,47.46 v1(61.087,47.752)
  Top Layer w0.381: 2.54,40.386 2.54,73.914 7.112,78.486 95.25,78.486 98.298,75.438 98.298,42.418 98.596,42.12 99.187,41.529 99.187,40.894 ; 3V3.1 8.128,26.162 8.255,26.289 ; 13.716,27.305 13.809,27.212 16.095,27.212 C27.2@16.129,27.178 ; C27.2 18.161,25.146 18.161,24.257 R16.2@19.177,23.241 ; 47.501,78.232 47.587,58.166 ; v1(47.752,45.339) 47.587,45.504 47.587,51.308 ; R31.1@49.657,51.308 47.587,51.308 ; R29.2 47.587,58.166 ; U2.1 60.822,47.89 v1@60.96,47.752 ; v1@65.913,48.768 R18.2 R17.2 68.745,47.409 R17.2@68.834,47.498 ; v1(65.913,48.895) 67.691,50.673 69.088,50.673 69.92,51.505 69.92,51.76 70.106,51.946 70.361,51.946 74.422,56.007 74.422,57.277 74.168,57.531 U1.3@72.263,57.531 ; R24.2@79.883,14.097 79.883,12.954 81.661,11.176 89.662,11.176 91.821,13.335 R25.2@91.821,14.097 ; R26.2 88.951,41.148 TEMP.3@89.535,41.148 ; R25.2@91.821,14.351 R25.2@91.821,14.097 ; TEMP.3@91.948,41.084 92.138,40.894 99.187,40.894 ; 47.587,51.308 47.587,58.166 ; R25.2@91.821,14.097 95.758,14.097 99.187,17.526 99.187,40.894
  GND w0.254: C5.1 C6.1@49.779,39.746 ; C6.1 49.779,43.048 50.292,43.561 C7.1@50.292,44.958 ; C10.2@50.271,46.757 51.774,48.26 C8.2@53.213,48.26 ; v1(53.086,45.847) 53.335,46.096 C8.2 54.115,48.895 56.134,48.895 57.277,47.752 C11.2@57.404,47.752 ; C11.2 C9.1 C9.1@59.22,47.79 ; C9.1@59.309,47.879 C9.1@59.22,47.79 ; v1@60.96,47.752 60.922,47.79 C9.1@59.22,47.79 ; P1.1@64.605,37.865 P1.1
  GND w0.381: v1(47.752,45.339) v1@47.868,45.339 ; v1@48.006,37.133 48.763,37.133 49.398,37.768 49.525,37.641 C5.1 ; C5.1@49.911,37.592 49.911,36.195 50.673,35.433 58.079,35.433 C12.2 v1(60.786,36.79) 62.016,35.56 C1.2@64.516,35.56 ; C7.1@49.911,44.958 49.53,45.339 v1@47.868,45.339 ; C10.2@50.165,46.863 49.392,46.863 v1@47.868,45.339 ; v1(61.087,47.752) 62.103,48.768 v1@65.913,48.768 ; C1.2 P1.1@64.605,37.865
  other v1: 48.133,37.084
  other v2: 2.54,27.432 4.826,27.432 7.112,27.432 9.398,27.432 11.684,27.432 3.683,29.718 5.969,29.718 8.255,29.718 10.541,29.718 12.827,29.718 2.54,32.004 4.826,32.004 3.683,34.29 5.969,34.29 2.54,36.576 4.826,36.576 3.683,38.862 5.969,38.862 8.255,38.862 10.541,38.862 12.827,38.862
+5V: C13.2 C14.1 C15.2 C16.1 C25.2 C26.2 E-C.4 E-E.4 M-F.2 M-P.2 POWER.1 R4.2 R5.2 R6.2 R7.2 U3.7 U4.7 U5.3 U5.4 ULTRA.1 VR1.3 | length 176.5
  Top Layer w0.254: VR1.3 18.237,36.37 19.849,34.758 C26.2
  Top Layer w0.381: U5.4@6.227,49.877 6.227,52.777 C25.2 3.621,55.383 3.621,59.231 5.145,60.755 16.64,60.755 17.512,61.626 19.895,61.626 21.909,59.612 U3.7 28.475,59.612 29.148,60.285 C13.2 35.841,60.285 38.546,57.58 C16.1@38.546,48.766 ; U5.4 5.207,48.773 5.207,47.498 9.652,43.053 15.24,43.053 17.145,41.148 17.145,36.322 VR1.3@17.272,36.195 ; C26.2 22.43,34.758 23.187,34.001 23.187,28.711 24.29,27.608 27.178,27.608 E-C.4 37.104,27.481 E-E.4 ; U4.7@33.453,48.69 33.529,48.766 C16.1@38.546,48.766 ; C15.2 42.318,48.766 C16.1 C16.1@38.546,48.766 ; v1@43.942,31.75 43.974,31.718 ULTRA.1 ; v1@57.646,28.049 M-P.2@61.206,28.049 ; M-P.2 61.288,27.686 69.723,27.686 M-F.2@70.104,27.305
  GND w0.381: v1(23.082,31.165) R6.2 R4.2 28.283,34.72 37.006,34.72 ; R7.2 R5.2 36.966,34.68 37.006,34.72 ; v1(43.815,31.75) 53.594,31.75 57.15,28.194 ; v1@43.815,31.877 43.815,34.29 42.418,35.687 38.989,35.687 38.022,34.72 37.006,34.72
  other v1: 57.531,28.067
-5V: -5V.1 C18.2 C19.2 C21.2 C22.2 C23.1 R12.1 U3.4 U4.4 U5.1 | length 39.7
  Top Layer w0.381: -5V.1@12.7,54.229 12.689,54.24 C23.1 9.59,54.09 8.127,52.627 8.127,51.804 9.082,50.849 C19.2 ; U3.4@18.62,57.072 18.62,55.218 18.442,55.04 17.464,55.04 15.559,53.135 C19.2 ; C21.2@24.703,46.353 20.22,46.353 20.004,46.569 19.849,46.414 15.559,46.414 C19.2 ; C21.2@24.894,46.543 25.287,46.15 U4.4@28.653,46.15
CAN_H: CAN1.1 CAN2.1 CANH1.1 D1.1 R2.1 U1.7 | length 34.8
  Top Layer w0.254: CANH1.1@75.946,73.533 CANH1.1@76.01,73.596 ; R2.1 77.851,71.755 CANH1.1@76.01,73.596 ; U1.7@78.232,58.674 82.931,58.674 84.008,59.751 D1.1 ; CAN1.1@83.947,74.93 77.343,74.93 CANH1.1@76.01,73.596 ; CAN2.1@83.979,66.599 83.979,60.039 D1.1@84.328,59.69 ; CAN2.1 CAN1.1
CAN_L: 1.1 CAN1.2 CAN2.2 CANL1.1 D1.2 U1.6 | length 53.3
  Top Layer w0.254: 1.1 73.406,68.326 73.406,73.533 77.724,77.851 85.598,77.851 86.106,77.343 CAN1.2@86.106,77.089 ; U1.6@78.002,57.404 77.875,57.531 83.566,57.531 D1.2@83.82,57.785 ; D1.2 84.521,57.851 85.979,59.309 CAN2.2@85.979,64.516 ; CAN2.2@85.979,65.405 86.106,65.532 CAN2.2 86.106,69.342 ; CAN1.2 86.106,69.342 ; CANL1.1 92.075,69.342 86.106,69.342
GND: C1.1 C2.1 C3.1 C4.1 C5.2 C6.2 C7.2 C8.1 C9.2 C10.1 C11.1 C12.1 C13.1 C14.2 C15.1 C16.2 C17.1 C18.1 C19.1 C21.1 C22.1 C23.2 C25.1 C26.1 C27.1 CAN1.3 CAN2.3 D1.3 D2.2 D3.2 D4.2 D5.2 D6.2 E-C.5 E-E.5 GND.1 LS-C.2 LS-E-B.2 LS-ET.2 M-A.3 M-C.3 M-E.3 M-F.1 M-P.1 MOIST.3 P1.5 pad.2 POWER.2 R1.2 R15.1 R19.1 R20.1 R21.1 R22.1 R23.1 R32.1 R32.2 S1.1 S2.2 S3.2 TEMP.1 U1.2 U2.12 U2.18 U2.31 U2.47 U2.63 U4.3 U5.2 ULTRA.4 VR1.1 Y1.2 | length 140
  Top Layer w0.254: v1(13.223,21.688) D2.2 ; VR1.1 20.522,31.8 v1(20.574,31.748) ; C19.1 23.573,50.849 v3(24.894,49.528) 25.643,49.528 27.751,47.42 U4.3@28.653,47.42 ; GND.1@20.193,29.718 20.574,30.099 v1(20.574,31.748) ; C27.1 21.082,25.425 v1(21.082,23.495) ; C26.1 20.701,31.875 v1(20.574,31.748) ; v1(22.804,12.565) M-E.3 ; E-C.5 30.815,25.481 v1@30.861,25.527 ; C14.2@29.148,57.085 29.4,56.832 30.48,57.912 v3(31.75,57.912) 32.948,57.912 C13.1 ; v1@33.782,25.4 33.894,25.512 E-E.5 ; v1(34.925,12.192) 34.927,12.194 M-A.3 ; C16.2@38.546,45.566 39.105,45.007 v3(42.356,45.007) C15.1 ; v1@43.815,25.781 43.878,25.718 ULTRA.4 ; MOIST.3@44.704,54.991 44.831,54.864 v1(44.831,53.467) ; v1@47.498,11.938 47.598,12.038 M-C.3 ; v1(48.006,38.657) 48.406,38.657 48.797,39.047 49.652,39.047 U2.31 ; v1@48.387,46.863 48.387,45.974 48.771,45.59 U2.18 ; S3.2 49.657,54.483 v1@49.784,54.61 ; S2.2 v1@49.911,61.341 ; U2.12 53.495,46.708 v1@54.229,45.974 ; v1(54.737,70.612) 54.789,70.56 D6.2 ; v1@56.642,70.612 56.744,70.51 D5.2 ; v1(57.15,51.054) 58.039,51.054 58.293,50.8 Y1.2@58.42,50.927 ; v1(57.785,38.481) 57.879,38.481 58.495,37.865 U2.47 ; v1@57.836,30.029 57.856,30.049 M-P.1@61.206,30.049 ; v1@58.42,44.069 59.941,45.59 U2.63 ; v1@58.547,70.612 v1(58.674,70.485) 58.7,70.459 D4.2 ; Y1.2@58.673,50.976 Y1.2@58.72,51.022 ; C2.1 v1(61.841,54.24) ; D3.2 60.655,70.434 v1(60.706,70.485) ; C3.1 61.841,52.625 v1(61.841,54.24) ; C4.1 v1(61.841,54.24) ; S1.1 65.096,61.385 v1@65.1,61.39 ; v1(66.548,29.591) 66.598,29.641 M-F.1 ; v1(69.342,18.034) 71.374,18.034 LS-C.2@71.501,17.907 ; v1(70.231,57.785) 70.612,57.785 U1.2@71.755,58.928 ; v1(76.962,38.862) 80.264,38.862 LS-E-B.2@80.391,38.989 ; LS-ET.2@84.658,17.891 88.376,17.891 v1@88.36,17.907 ; D1.3 v1(88.9,58.801) ; CAN2.3 88.106,67.659 88.138,67.691 v1(89.789,67.691) ; CAN1.3 88.106,76.295 88.138,76.327 v1(90.043,76.327) ; TEMP.1@91.053,37 94.531,37 94.533,37.003
  Top Layer w0.381: C25.1 7.035,55.84 v3(7.177,55.698) ; U5.2@7.304,52.754 7.177,52.627 v3(7.177,55.698) ; C23.2 9.448,55.698 v3(7.177,55.698) ; C18.1@15.559,44.814 19.976,44.814 C22.1 22.091,44.842 v3(22.225,44.708) 23.704,43.229 C21.1@24.627,43.229 ; C21.1@24.754,43.483 C21.1@24.83,43.407
  GND w0.254: R32.2 45.162,42.722 R32.1@45.212,42.672
  other v1: 47.244,11.938 88.265,17.907 30.861,25.4 33.655,25.527 43.688,25.781 57.531,29.972 94.914,37.003 58.547,44.069 54.483,45.847 48.387,46.99 49.784,54.483 49.911,61.214 65.084,61.517 56.769,70.612
Net1_2: 1.2 R2.2 | length 5.8
  Top Layer w0.254: 1.2@74.295,64.643 74.93,64.643 77.851,67.564 R2.2
NetC2_2: C2.2 R8.2 Y1.1 | length 4
  Top Layer w0.254: R8.2@56.007,54.151 56.096,54.24 C2.2 58.255,52.636 Y1.1
NetC3_2: C3.2 U2.5 Y1.3 | length 7.4
  Top Layer w0.254: U2.5@57.003,47.89 57.003,49.227 57.304,49.528 59.218,49.528 59.67,49.98 Y1.3@59.67,51.015 ; Y1.3@60.02,50.835 60.02,51.022 61.715,51.022 C3.2@61.815,51.122
NetC17_2: C17.2 R9.2 U3.3 | length 6.9
  Top Layer w0.254: v3@16.321,57.326 17.337,58.342 U3.3@18.62,58.342
  GND w0.254: R9.2@14.327,60.12 C17.2 15.051,58.088 v3(16.067,57.072)
NetC20_1: C20.1 R14.3 U3.2 | length 15.9
  Top Layer w0.381: v3@16.448,59.612 U3.2@18.62,59.612
  GND w0.254: v3@16.321,59.358 C20.1 20.093,67.931 R14.3 ; R14.3@19.115,68.883 R14.3@19.291,68.707
  other v3: 16.321,59.612
NetC20_2: C20.2 R11.1 R13.2 U3.6 | length 12.9
  Top Layer w0.254: U3.6 25.211,58.342 26.1,57.453 v1(26.1,56.31)
  GND w0.254: R11.1@21.59,57.531 21.693,57.634 C20.2 ; R11.1 22.737,58.37 R13.2 v1(26.1,56.31)
NetC24_1: C24.1 U5.5 | length 2.2
  Top Layer w0.254: C24.1 6.758,48.525 7.177,48.944 U5.5@7.177,49.877
NetC24_2: C24.2 U5.6 | length 2.2
  Top Layer w0.254: U5.6@8.127,49.877 8.127,48.718 8.358,48.487 C24.2
NetD2_1: D2.1 R16.1 | length 2.1
  Top Layer w0.254: D2.1 19.078,21.688 R16.1
NetD3_1: D3.1 R27.2 | length 4.5
  Top Layer w0.254: R27.2 60.655,63.654 D3.1
NetD4_1: D4.1 R28.2 | length 4.4
  Top Layer w0.254: R28.2 58.7,63.561 D4.1
NetD5_1: D5.1 R30.2 | length 4.4
  Top Layer w0.254: R30.2 56.769,63.493 56.769,66.193 D5.1
NetD6_1: D6.1 R33.2 | length 4.3
  Top Layer w0.254: R33.2 54.789,63.376 D6.1
NetE-C_1: E-C.1 EC1.1 R4.1 U2.23 | length 34.6
  Top Layer w0.254: E-C.1@27.051,33.608 27.051,39.624 29.083,41.656 EC1.1@29.337,41.656 ; E-C.1@28.956,33.481 v1@31.113,33.481 ; EC1.1 30.924,43.116 35.052,43.116 ; 34.925,43.09 U2.23
  GND w0.254: R4.1 31.082,33.45 v1(31.115,33.483)
NetE-C_2: E-C.2 EC2.1 R6.1 U2.24 | length 33.9
  Top Layer w0.254: E-C.2 31.071,31.481 31.965,32.374 31.965,39.559 35.027,42.621 49.663,42.621 U2.24
  GND w0.254: R6.1 30.785,31.165 v1(31.165,31.545)
NetE-C_3: E-C.3 ECI.1 U2.25 | length 50.6
  Top Layer w0.254: E-C.3 31.219,29.481 32.639,30.901 32.639,36.325 38.404,42.09 46.611,42.09 46.686,42.164 48.818,42.164 48.893,42.09 U2.25
  GND w0.254: ECI.1 v1@30.988,29.337
  other v1: 31.115,29.464
NetE-E_1: E-E.1 EE1.1 R5.1 U2.26 | length 27.2
  Top Layer w0.254: EE1.1@39.243,39.37 37.135,37.262 E-E.1 40.865,33.512 v1(40.894,33.483) 40.894,38.481 43.991,41.578 U2.26@48.967,41.578
  GND w0.254: R5.1 40.792,33.585 v1(40.894,33.483)
NetE-E_2: E-E.2 EE2.1 R7.1 U2.27 | length 53.8
  Top Layer w0.254: E-E.2 40.821,31.512 v1(40.854,31.545) 41.7,32.39 41.7,36.276 46.514,41.09 U2.27
  GND w0.254: EE2.1@28.194,4.064 28.194,18.923 v1@40.767,31.496 ; R7.1 38.82,31.545 v1(40.854,31.545)
NetE-E_3: E-E.3 EEI.1 U2.28 | length 49.6
  Top Layer w0.254: E-E.3 41.274,29.512 42.291,30.529 42.291,36.22 46.66,40.59 U2.28
  GND w0.254: EEI.1@32.131,4.064 32.131,20.955 v1@40.767,29.591
  other v1: 40.894,29.464
NetJ1_1: pad.1 R9.1 | length 28.4
  GND w0.254: R9.1@12.727,60.12 12.727,66.624 16.129,70.026 25.144,70.026 28.827,66.343 31.447,66.343 pad.1@31.623,66.167
NetLS-C_1: LS-C.1 R24.1 U2.41 | length 43
  Top Layer w0.254: U2.41 55.538,36.747 55.538,28.917 57.556,26.899 63.685,26.899 64.516,26.067 64.516,17.018 65.659,15.875 LS-C.1 79.756,15.875 R24.1@79.883,16.002
NetLS-E-B_1: LS-E-B.1 R26.1 U2.45 | length 32.5
  Top Layer w0.254: U2.45 57.495,34.58 58.115,33.96 75.108,33.96 78.232,37.084 R26.1@86.233,37.084
NetLS-ET_1: LS-ET.1 R25.1 U2.44 | length 45.7
  Top Layer w0.254: U2.44 56.995,34.433 57.926,33.503 70.358,33.503 74.549,29.312 74.549,23.749 LS-ET.1@82.169,16.129 ; LS-ET.1 91.821,15.875 R25.1@91.948,15.748
NetM-A_1: M-A.1 PWMA.1 R23.2 U2.36 | length 51.6
  Top Layer w0.254: PWMA.1@36.449,3.937 34.061,6.325 34.061,15.392 34.671,16.002 v1(34.925,16.002) 35.117,16.194 M-A.1 38.553,19.249 40.513,21.209 45.974,21.209 46.023,21.258 50.571,21.258 52.995,23.681 U2.36
  GND w0.254: v1@35.09,16.04 R23.2
NetM-A_2: M-A.2 U2.37 | length 37.4
  Top Layer w0.254: v1@34.925,14.097 35.022,14.194 M-A.2 43.023,14.194 45.593,16.764 45.593,19.657 46.736,20.8 50.761,20.8 53.495,23.535 U2.37
  other v1: 34.798,14.097
NetM-C_1: M-C.1 PWMC.1 R21.2 U2.38 | length 42.6
  Top Layer w0.254: PWMC.1@46.863,3.937 44.831,5.969 44.831,13.589 v1(47.244,16.002) 47.28,16.038 M-C.1 51.126,20.519 53.995,23.388 U2.38
  GND w0.254: v1@47.371,16.002 48.485,14.888 R21.2
NetM-C_2: M-C.2 U2.39 | length 25.8
  Top Layer w0.254: M-C.2 53.408,14.038 54.483,15.113 54.483,23.241 ; 54.495,22.901 U2.39
NetM-E_1: M-E.1 PWME.1 R19.2 U2.34 | length 61.9
  Top Layer w0.254: PWME.1@16.764,4.064 16.764,10.746 v1(22.655,16.637) 22.727,16.565 M-E.1 ; M-E.1@27.432,16.764 27.432,19.607 32.463,24.638 50.927,24.638 51.995,25.706 U2.34
  GND w0.254: v1(22.655,16.637) 24.344,16.637 R19.2
NetM-E_2: M-E.2 U2.35 | length 42.7
  Top Layer w0.254: M-E.2 28.916,14.565 36.195,21.844 50.511,21.844 52.495,23.828 U2.35
NetM-F_3: M-F.3 PWMF.1 R22.2 U2.42 | length 45.8
  Top Layer w0.254: U2.42 56.007,36.778 56.007,30.454 57.632,28.829 63.754,28.829 64.008,28.575 73.025,28.575 73.533,28.067 73.533,26.416 72.504,25.387 M-F.3@70.195,25.387 ; PWMF.1 65.659,19.05 65.659,25.019 v1@66.421,25.781 ; v1(66.675,25.654) 66.688,25.641 M-F.3
  GND w0.254: v1@66.802,25.527 66.929,25.654 R22.2
NetM-P_3: M-P.3 PWMP.1 R20.2 U2.40 | length 30.5
  Top Layer w0.254: U2.40 54.995,28.696 57.529,26.162 v1(57.531,26.162) 61.093,26.162 M-P.3@61.206,26.049 ; PWMP.1 M-P.3@62.484,25.781
  GND w0.254: v1(57.531,26.162) 59.343,26.162 59.457,26.049 R20.2@59.67,26.262
NetMOIST_1: MOIST-P.1 MOIST.1 U2.20 | length 27.2
  Top Layer w0.254: MOIST-P.1@43.815,65.151 43.104,64.44 MOIST.1 43.11,59.17 46.482,59.17 46.736,58.916 46.736,44.835 46.981,44.59 U2.20
NetMOIST_2: MOIST-D.1 MOIST.2 U2.21 | length 35.6
  Top Layer w0.254: MOIST.2@40.767,57.277 38.1,59.944 38.1,64.897 MOIST-D.1@44.323,71.12 ; MOIST.2 45.362,57.176 46.228,56.31 46.228,44.624 46.771,44.082 U2.21@48.895,44.082
NetP1_2: P1.2 U2.51 UART_U.1 | length 20.8
  Top Layer w0.254: U2.51 62.645,39.59 63.228,39.007 66.025,39.007 P1.2
  GND w0.254: P1.2 67.156,37.492 UART_U.1@76.581,28.067
NetP1_3: P1.3 U2.52 UART_R.1 | length 20.8
  Top Layer w0.254: U2.52 62.69,40.09 64.148,41.547 65.085,41.547 65.747,40.885 65.747,40.029 66.769,39.007 67.625,39.007 68.756,37.876 P1.3
  GND w0.254: P1.3 75.822,31.75 UART_R.1@76.454,31.75
NetP1_4: P1.4 U2.54 UART_RTS.1 | length 29.3
  Top Layer w0.254: U2.54 63.043,41.09 63.958,42.004 69.707,42.004 71.105,40.607 71.105,39.142 P1.4@72.136,38.112 ; P1.4@72.136,37.719 P1.4@72.136,38.112 ; P1.4 72.236,38.011 P1.4@72.136,38.112 ; UART_RTS.1@82.931,46.736 80.645,46.736 72.136,38.227 P1.4@72.136,38.112
NetP1_6: P1.6 U2.46 | length 14.6
  Top Layer w0.254: U2.46 57.995,35.477 v1@58.547,34.925
  GND w0.254: v1(58.801,34.798) 58.936,34.933 65.16,34.933 65.309,35.082 65.309,36.53 65.747,36.968 65.747,38.95 P1.6@67.056,40.259
NetP1_7: P1.7 U2.49 | length 14.7
  Top Layer w0.254: U2.49 60.813,38.608 61.595,38.608 63.458,36.745 70.165,36.745 70.993,37.574 70.993,38.608 69.696,39.905 P1.7
NetPH_1: PH.1 R10.2 U2.22 U4.6 | length 33.3
  Top Layer w0.254: PH.1@33.274,53.594 31.915,52.235 R10.2 32.586,43.574 35.433,43.574 ; U4.6 34.622,47.42 35.433,46.609 35.433,43.574 ; 35.433,43.561 35.433,43.574 ; U2.22 49.679,43.574 35.433,43.574
NetR1_1: R1.1 U1.8 | length 3.4
  Top Layer w0.254: v1@77.851,61.976 77.875,61.952 U1.8@77.875,60.071
  GND w0.254: v1(77.851,61.849) R1.1
NetR3_1: R3.1 TEMP.2 TEMPT.1 U2.50 | length 50.6
  Top Layer w0.254: U2.50 59.378,39.09 59.055,38.767 59.055,38.313 59.759,37.61 61.947,37.61 64.631,34.925 71.374,34.925 74.422,37.973 87.757,37.973 87.82,37.91 ; TEMPT.1@87.884,29.337 87.884,37.846 87.82,37.91 ; TEMP.2 89.027,39.116 87.82,37.91 ; TEMP.2@93.218,39.37 R3.1
NetR8_1: R8.1 U2.6 | length 4
  Top Layer w0.254: R8.1@56.007,52.551 56.007,50.901 56.495,50.413 56.495,48.842 U2.6@56.495,48.746
NetR10_1: R10.1 R11.2 R12.2 U4.2 | length 21.1
  Top Layer w0.254: R12.2@20.042,55.04 21.655,55.04 28.005,48.69 U4.2 29.718,48.69 30.531,47.877 R10.1@30.531,43.991
  GND w0.254: R11.2 20.093,55.599 20.701,54.991 v1(21.844,54.991)
NetR13_1: R13.1 R14.1 | length 9.6
  GND w0.254: R14.1@24.195,68.883 26.1,66.978 26.1,60.133 R13.1@26.162,60.071
NetR14_2: R14.2 R15.2 | length 2.2
  GND w0.254: R15.2 R14.2@21.617,66.305
NetR17_1: R17.1 RGB.1 SCL.1 U2.58 | length 28.5
  Top Layer w0.254: U2.58 65.823,43.09 R17.1@68.326,45.593 ; R17.1@69.088,45.593 70.358,44.323 74.168,44.323 75.438,45.593 RGB.1
  GND w0.254: v1(74.168,44.45) 75.184,44.45 80.391,49.657 SCL.1@82.296,49.657
NetR18_1: R18.1 RGB.2 SDA.1 U2.59 | length 21.6
  Top Layer w0.254: U2.59 63.656,43.59 R18.1@65.532,45.466 ; R18.1@65.532,46.101 64.77,46.863 64.77,50.165 67.183,52.578 SDA.1 ; R18.1 66.713,46.609 RGB.2@73.406,46.609
NetR27_1: R27.1 U2.8 | length 14.4
  Top Layer w0.254: U2.8@55.474,48.641 55.474,49.882 54.61,50.746 54.61,56.009 R27.1
NetR28_1: R28.1 U2.9 | length 14.5
  Top Layer w0.254: U2.9@54.991,48.006 54.94,48.057 54.94,49.743 54.102,50.581 54.102,57.363 R28.1
NetR29_1: R29.1 S2.1 U2.14 | length 16.2
  Top Layer w0.254: S2.1@50.165,63.119 52.451,60.833 52.451,48.08 52.452,48.079 52.452,47.932 U2.14
NetR30_1: R30.1 U2.10 | length 14
  Top Layer w0.254: U2.10@54.483,47.879 54.483,49.553 53.594,50.442 53.594,58.718 R30.1
NetR31_2: R31.2 S3.1 U2.15 | length 9.8
  Top Layer w0.254: S3.1 50.116,56.437 51.181,55.372 51.181,51.346 R31.2 ; R31.2@51.181,51.181 51.054,51.054 51.054,49.889 51.899,49.044 51.899,47.986 U2.15
NetR33_1: R33.1 U2.11 | length 13.7
  Top Layer w0.254: R33.1 53.086,60.073 53.086,50.304 53.452,49.937 53.452,49.926 53.952,49.426 53.952,47.648 U2.11@53.975,47.625
NetU1_1: U1.1 U2.62 | length 21.1
  Top Layer w0.254: U2.62 60.838,45.047 62.103,45.047 63.5,46.444 63.5,52.324 71.247,60.071 U1.1@72.225,60.071
NetU1_4: U1.4 U2.61 | length 19.5
  Top Layer w0.254: U2.61 62.751,44.59 64.135,45.974 64.135,51.946 68.577,56.388 U1.4@71.882,56.388
NetU2_29: U2.29 ULTRA.2 UT.1 | length 42.8
  Top Layer w0.254: v1@43.053,29.845 43.053,36.336 46.807,40.09 U2.29 ; v1(43.18,29.845) ULTRA.2@44.831,29.845
  GND w0.254: UT.1@42.545,3.81 42.545,29.21 v1(43.18,29.845) v1@43.307,29.972
NetU2_30: U2.30 UE.1 ULTRA.3 | length 41
  Top Layer w0.254: ULTRA.3@47.339,27.686 ULTRA.3 50.895,27.718 v1(50.927,27.686) 50.927,39.179 50.516,39.59 U2.30
  GND w0.254: v1(50.927,27.686) 52.197,26.416 UE.1
R\S\T\: C4.2 P1.8 S1.4 U2.7 | length 53.2
  Top Layer w0.254: U2.7 55.995,48.695 56.007,48.707 56.007,50.255 55.118,51.144 55.118,54.61 56.515,56.007 C4.2@63.46,56.007 ; S1.4 63.446,56.021 C4.2@63.46,56.007 ; S1.4@63.5,57.15 67,60.65 73.843,60.65 75.184,59.309 75.184,56.261 76.708,54.737 76.708,43.815 73.309,40.416 P1.8 ; C4.2 C4.2@63.46,56.007
  GND w0.254: P1.8@72.166,40.416 P1.8
pads on no net: CAN1.4 CAN1.5 CAN2.4 CAN2.5 E-C.6 E-C.7 E-E.6 E-E.7 LS-C.3 LS-C.4 LS-E-B.3 LS-E-B.4 LS-ET.3 LS-ET.4 M-A.4 M-A.5 M-C.4 M-C.5 M-E.4 M-E.5 M-F.4 M-F.5 M-P.4 M-P.5 MH1.0 MH2.0 MH3.0 MH4.0 MOIST.4 MOIST.5 RGB.3 RGB.4 S1.2 S1.3 TEMP.4 TEMP.5 U1.5 U2.2 U2.3 U2.4 U2.16 U2.17 U2.33 U2.43 U2.53 U2.55 U2.56 U2.57 U2.60 U3.1 U3.5 U3.8 U4.1 U4.5 U4.8 ULTRA.5 ULTRA.6 Y1.4

## Polygon pours and split planes (outlines as drawn)
GND on GND "GND" (solid, pour order 23): 0.007,42.164 26.811,42.164 28.026,43.378 49.6,43.378 49.6,44.805 47.038,44.805 46.978,44.864 46.978,80 0.007,80
+3V3 on GND "GND-+3V3" (solid, pour order 22): 0.127,41.783 0.254,41.656 0.254,25.654 14.605,25.654 14.605,41.783
GND on GND "GND-No Net" (solid, pour order 24): 0.019,25.703 0.019,0 100.711,0 100.711,80 47.371,80 47.371,45.014 49.803,45.014 49.993,44.823 49.993,43.337 49.803,43.147 28.386,43.147 26.895,41.656 14.628,41.656 14.628,25.703
no net on GND "GND-No Net 1" (solid, pour order 25): 0.762,40.894
+3V3 on Top Layer "3V3 top" (solid, pour order 20): 14.628,41.705 14.628,25.703 0.023,25.703 0.023,41.705

## Keep-outs
Keep-Out Layer:
  the board outline again, w1.2

## Other copper
Top Layer:
  pour cut-out: 41.722,40.423
GND:
  pour cut-out: 10.351,40.531
  pour cut-out: 5.524,41.152

## Silkscreen, mask and mechanical layers (free items; w line width, h text height)
Top Overlay:
  circle w0.25: c31.623,63.424 r0.125
  lines w0.2: 26.813,78.994 26.813,64.074 41.513,64.074 41.513,78.994
  text "Science Board  / Rev. 1 / Adrianna Ascalon" at 76.454,2.54 h1.02
Mechanical 13:
  lines w0.1: 26.813,64.074 26.813,79.248 41.513,79.248 41.513,64.074 26.813,64.074
Mechanical 15:
  lines w0.05: 26.713,63.974 26.713,79.375 41.613,79.375 41.613,63.974 26.713,63.974
  lines w0.1: 33.663,71.374 34.663,71.374 ; 34.163,70.874 34.163,71.874

## Text inside footprints (layer, text, board x,y; h text height)
P1: Top Overlay "TX" at 67.416,34.724 h0.76 r90; Top Overlay "RX" at 70.016,34.724 h0.76 r90; Top Overlay "RTS" at 72.716,33.997 h0.76 r90; Top Overlay "IO" at 67.416,42.322 h0.76 r90; Top Overlay "CLK" at 70.016,42.222 h0.76 r90; Top Overlay "RST" at 72.536,42.322 h0.76 r90; Top Overlay "VCC" at 64.816,33.922 h0.76 r90; Top Overlay "GND" at 64.916,42.322 h0.76 r90